# EAGLE board test3 (EAGLE 9.5.1)
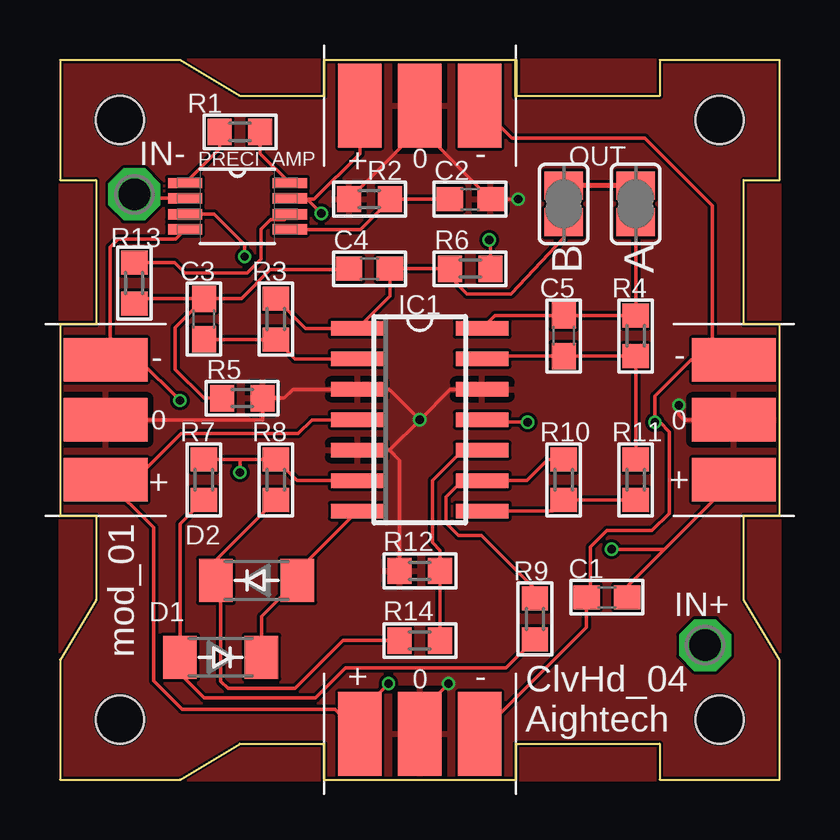
[diagram p0: board, top side]
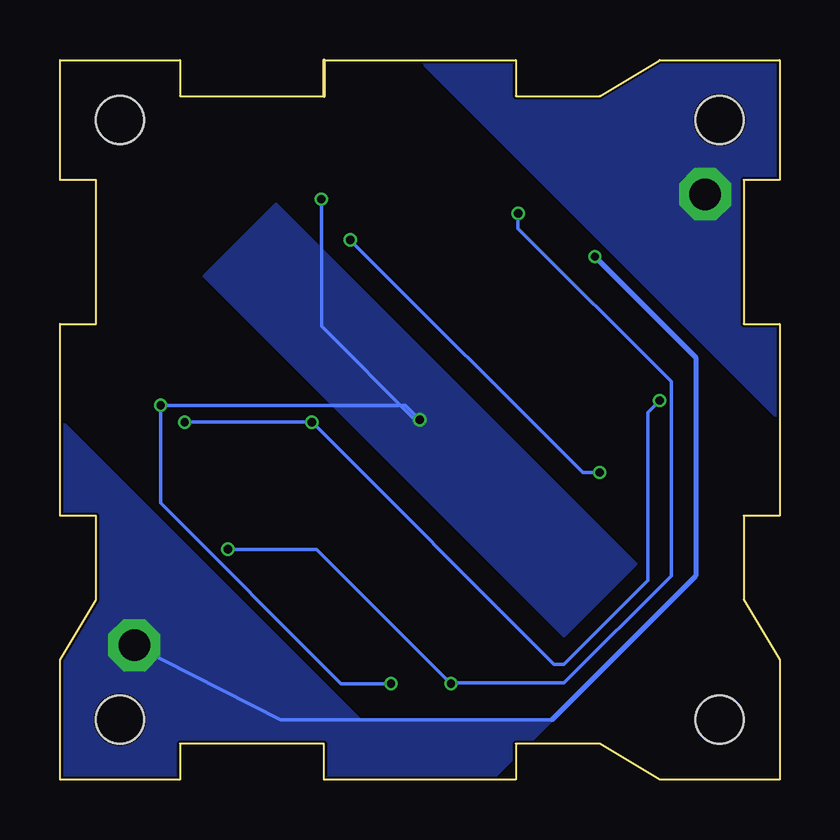
[diagram p1: board, bottom side, seen from below]

Size 30 x 30 mm. Coordinates in mm from the lower left corner, seen from the top.
Outline: 7.5,1.5 11,1.5 11,0 19,0 19,1.5 25,1.5 25,0 30,0 30,5 28.5,7.5 28.5,11 30,11 30,19 28.5,19 28.5,25 30,25 30,30 25,30 25,28.5 19,28.5 19,30 11,30 11,28.5 7.5,28.5 5,30 0,30 0,25 1.5,25 1.5,19 0,19 0,11 1.5,11 1.5,7.5 0,5 0,0 5,0 7.5,1.5
Copper layers (1*16): Top 0.035559375mm / dielectric 0.17018125mm / Bottom 0.035559375mm
Design rules "jlcpcb-4-layer *": minimum track width 5mil, minimum drill 0.2mm, track to track 0.126490625mm, track to pad 0.126490625mm, pad to pad 0.126490625mm, via to via 0.126490625mm, smd to smd 0mil, copper to edge 0.1mm, drill to drill 5mil, minimum pad ring 4mil, minimum via ring 4mil, stop-mask expansion 3mil, vias tented up to drill 100mil, thermal gap 10mil
Holes 2 mm at 2.5,2.5 27.5,27.5 2.5,27.5 27.5,2.5

## Footprints (pad centres in the part's own frame; a part is rotated, then mirrored left to right if it is on the bottom)
SJ = smd 1.168 x 1.6: 1 -0.762,0; 2 0.762,0
C0603 = smd 1.1 x 1: 1 -0.85,0; 2 0.85,0
SOD80 = smd 1.4 x 1.8: 1 -1.7,0; 2 1.7,0
SO14 = smd 0.6 x 2.2: 1 -3.81,-2.6; 2 -2.54,-2.6; 3 -1.27,-2.6; 4 0,-2.6; 5 1.27,-2.6; 6 2.54,-2.6; 7 3.81,-2.6; 8 3.81,2.6; 9 2.54,2.6; 10 1.27,2.6; 11 0,2.6; 12 -1.27,2.6; 13 -2.54,2.6; 14 -3.81,2.6
P1-13 = drill 1.321 pad 2.159 octagon: TP 0,0
SOP65P490X110-8N = smd 1.422 x 0.432: 1 -2.184,0.965; 2 -2.184,0.33; 3 -2.184,-0.33; 4 -2.184,-0.965; 5 2.184,-0.965; 6 2.184,-0.33; 7 2.184,0.33; 8 2.184,0.965
R0603 = smd 1 x 1.1: 1 -0.85,0; 2 0.85,0
009176003 = smd 1.8 x 3.5: 1 -2.5,0; 2 0,0; 3 2.5,0

## Placement (x,y rotation side)
A  0  [SJ]  24,24 90 top
B  0  [SJ]  21,24 90 top
C1  0.1nF  [C0603]  22.8,7.6 180 top
C2  1nF  [C0603]  17.1,24.2 180 top
C3  0.1nF  [C0603]  6,19.2 90 top
C4  0.1nF  [C0603]  12.9,21.3 180 top
C5  0.1nF  [C0603]  21,18.5 90 top
D1  0  [SOD80]  6.7,5.1 180 top
D2  0  [SOD80]  8.2,8.3 0 top
IC1  LMV324M  [SO14]  15,15 270 top
IN+  PTR1PAD1-13  [P1-13]  26.9,5.6 0 top
IN-  PTR1PAD1-13  [P1-13]  3.1,24.4 0 top
PRECI_AMP  INA326EA/250  [SOP65P490X110-8N]  7.4,23.9 0 top
R1  100k  [R0603]  7.5,27 0 top
R2  100k  [R0603]  12.9,24.2 0 top
R3  100k  [R0603]  9,19.2 90 top
R4  100k  [R0603]  24,18.5 90 top
R5  100k  [R0603]  7.6,15.9 0 top
R6  100k  [R0603]  17.1,21.3 0 top
R7  100k  [R0603]  6,12.5 270 top
R8  100k  [R0603]  9,12.5 270 top
R9  100k  [R0603]  19.8,6.7 90 top
R10  100k  [R0603]  21,12.5 270 top
R11  100k  [R0603]  24,12.5 90 top
R12  100k  [R0603]  15,8.7 0 top
R13  100k  [R0603]  3.1,20.7 270 top
R14  100k  [R0603]  15,5.8 180 top
X3  009176003  [009176003]  15,1.9 0 top
X4  009176003  [009176003]  28.1,15 90 top
X5  009176003  [009176003]  15,28.1 0 top
X6  009176003  [009176003]  1.9,15 90 top

## Library data of the parts
A B = jumper
C1-C5 = rcl; SPICEPREFIX: C
D1 D2 = semicon-smd-ipc
IC1 = linear; SPICEPREFIX: J
IN+ IN- = testpad
PRECI_AMP = INA326EA_250; DESCRIPTION: Precision, Low Drift, CMOS Instrumentation Amplifier 8-VSSOP -40 to 85; DIGI-KEY_PART_NUMBER: 296-15312-1-ND; DIGI-KEY_PURCHASE_URL: https://www.digikey.com/product-detail/en/texas-instruments/INA326EA-250/296-15312-1-ND/568254?utm_source=snapeda&utm_medium=aggregator&utm_campaign=symbol; MF: Texas Instruments; MP: INA326EA/250; PACKAGE: MSOP-8 Texas Instruments
R1-R14 = rcl; SPICEPREFIX: R
X3-X6 = pinsmd; MPN: 009176003001106; OC_FARNELL: 1778540; OC_NEWARK: 52R7005

## Nets
GNDA: C2.1 IC1.3 IC1.5 IC1.12 R2.1 R5.2 R12.1 X3.2 X4.2 X5.2 X6.2
INM: IN-.TP PRECI_AMP.2
INP: IN+.TP PRECI_AMP.3
N$1: PRECI_AMP.1 R1.1
N$2: PRECI_AMP.8 R1.2
N$4: C2.2 PRECI_AMP.5 R2.2
N$6: C3.1 IC1.2 R3.1
N$7: C3.2 C4.2 R5.1 R13.2
N$8: C5.1 IC1.13 R4.1 R11.2
N$9: PRECI_AMP.6 R13.1
N$10: IC1.6 R6.2 R7.1 R8.1
N$11: D2.1 R8.2 R14.2
N$12: IC1.9 R9.2 R10.1
N$13: D1.1 D2.2 IC1.7
N$14: D1.2 R7.2 R9.1
N$15: IC1.8 R10.2 R11.1
N$16: A.1 C5.2 IC1.14 R4.2
N$17: A.2 B.2
N$18: IC1.10 R12.2 R14.1
N$23: B.1 C4.1 IC1.1 R3.2 R6.1
V+: C1.1 IC1.4 PRECI_AMP.7 X3.1 X4.1 X5.1 X6.1
V-: C1.2 IC1.11 PRECI_AMP.4 X3.3 X4.3 X5.3 X6.3

## Tracks (layer width: path | path; a pad name or v marks a point on that pad's centre or on a via)
GNDA  (via drill 0.35)
  Top 0.152: X3.2 15,2.8 v16.2,4 | v15,15 13.73,16.27 IC1.3 9.72,16.27 9.35,15.9 R5.2 8.45,15 X6.2 | IC1.12 16.27,16.27 v15,15 | IC1.5 13.73,13.73 | 13.73,13.73 v15,15 | R12.1 14.15,13.31 13.73,13.73 | R2.1 15,27.15 | X5.2 15,27.15 | 15,27.15 C2.1 v19.1,24.2 | v25.8,15.6 25.8,15.2 26,15 28,15
  Bottom 0.152: v19.1,24.2 19.1,18.9 15.2,15 v15,15 15.6,15.6 v25.8,15.6 25.8,11.52 18.28,4 v16.2,4
  pour Bottom: 6,9 21,24 24,21 9,6
  pour Top: 0,30 30,30 30,0 0,0
INM
  Top 0.152: PRECI_AMP.2 3.27,24.23 IN-.TP
  pour Bottom (no thermals): 0,30 15,30 0,15
INP  (via drill 0.35)
  Top 0.152: PRECI_AMP.3 6.43,23.57 7.7,22.3 v7.7,21.8
  Bottom 0.152: IN+.TP 20.8,2.5 9.5,2.5
  Bottom 0.2: v7.7,21.8 3.5,17.6 3.5,8.5 9.5,2.5
  pour Bottom (no thermals): 30,0 30,15 15,0
  pour Bottom (no thermals): 11.9,0.1 9.5,2.5 17.7,2.5 15.3,0.1
N$1
  Top 0.152: PRECI_AMP.1 6.65,26.3 R1.1
N$2
  Top 0.152: R1.2 8.35,26.1 PRECI_AMP.8
N$4
  Top 0.152: R2.2 13.8,24.2 | 13.8,24.2 C2.2 | PRECI_AMP.5 12.54,22.93 13.8,24.2
N$6
  Top 0.152: C3.1 R3.1 9.81,17.54 IC1.2
N$7
  Top 0.152: R13.2 3.3,20.05 C3.2 | C3.2 4.8,18.85 4.8,17.1 6,15.9 R5.1 | C3.2 7.56,20.05 8.77,21.25 12,21.25 C4.2
N$8
  Top 0.152: R11.2 R4.1 C5.1 17.71,17.65 IC1.13
N$9
  Top 0.152: R13.1 4.79,21.55 5.22,21.12 7.79,21.12 8.38,21.7 8.38,22.94 8.79,23.35 9.37,23.35 PRECI_AMP.6
N$10  (via drill 0.35)
  Top 0.152: R7.1 7.5,13.35 | 7.5,13.35 R8.1 9.89,12.46 IC1.6 | v7.5,12.8 7.5,13.35 | v17.9,22.5 17.95,22.45 R6.2
  Bottom 0.152: v17.9,22.5 8.2,12.8 v7.5,12.8
N$11
  Top 0.152: R8.2 6.5,9.15 D2.1 6.7,8.1 6.7,4.1 7,3.8 9.8,3.8 11.8,5.8 R14.2
N$12
  Top 0.152: R10.1 20.35,13.35 19.46,12.46 IC1.9 16.78,12.46 16.1,11.77 16.1,10.71 16.62,10.19 17.56,10.19 19.8,7.95 R9.2
N$13
  Top 0.152: IC1.7 9.9,8.69 D2.2 8.4,6.8 D1.1
N$14
  Top 0.152: R7.2 5,10.65 D1.2 5,4.4 6,3.4 10.66,3.4 11.92,4.65 18.6,4.65 R9.1
N$15
  Top 0.152: IC1.8 20.54,11.19 R10.2 R11.1
N$16
  Top 0.152: IC1.14 18.14,19.35 C5.2 R4.2 A.1
N$17
  Top 0.203: A.2 B.2
N$18
  Top 0.152: R14.1 R12.2 15.85,9.56 15.52,9.88 15.52,12.47 16.72,13.66 17.53,13.66 IC1.10
N$23
  Top 0.152: R3.2 10.24,18.81 IC1.1 13.75,20.16 C4.1 R6.1 16.25,20.96 16.97,20.25 18.8,20.25 21,22.6 B.1
V+  (via drill 0.35)
  Top 0.152: C1.1 23.65,8.05 X4.1 25.2,9.6 v23,9.6 | IC1.4 10.5,15 9.93,14.43 5.05,14.43 3.11,12.5 X6.1 3.9,10.5 3.9,4.12 5.09,2.92 11.48,2.92 X3.1 12.5,2.8 v13.7,4 | X5.1 12.5,26.1 10.6,24.2 9.62,24.2 PRECI_AMP.7 10.27,24.23 v10.9,23.6
  Bottom 0.152: v23,9.6 19.3,9.6 v13.7,4 13.68,4.02 8.98,4.02 4.52,8.48 4.52,16.6 10.9,22.98 v10.9,23.6
V-  (via drill 0.35)
  Top 0.152: X3.3 21.95,6.35 C1.2 22.12,7.77 22.12,9.7 22.8,10.38 24.68,10.38 25.4,11.09 25.4,14.5 25,14.9 v24.8,14.9 24.8,16 26.3,17.5 X4.3 27.2,18.4 27.2,23.93 24.38,26.75 18.85,26.75 X5.3 | PRECI_AMP.4 4.82,22.54 2.44,22.54 2.1,22.2 2.1,17.7 X6.3 3.3,17.5 v5,15.8 | v19.5,14.9 17.7,14.9 IC1.11
  Bottom 0.152: v5,15.8 5.5,15.3 5.5,8.3 9,4.8 9.4,4.8 v19.5,14.9 v24.8,14.9

## Text on the board
tPlace: mod_01 | ClvHd_04 / Aightech
tNames: 0 | - | OUT | + | - | - | 0 | 0 | + | + | + | 0 | -